# EAGLE board V2b_pcb (EAGLE 6.5.0)
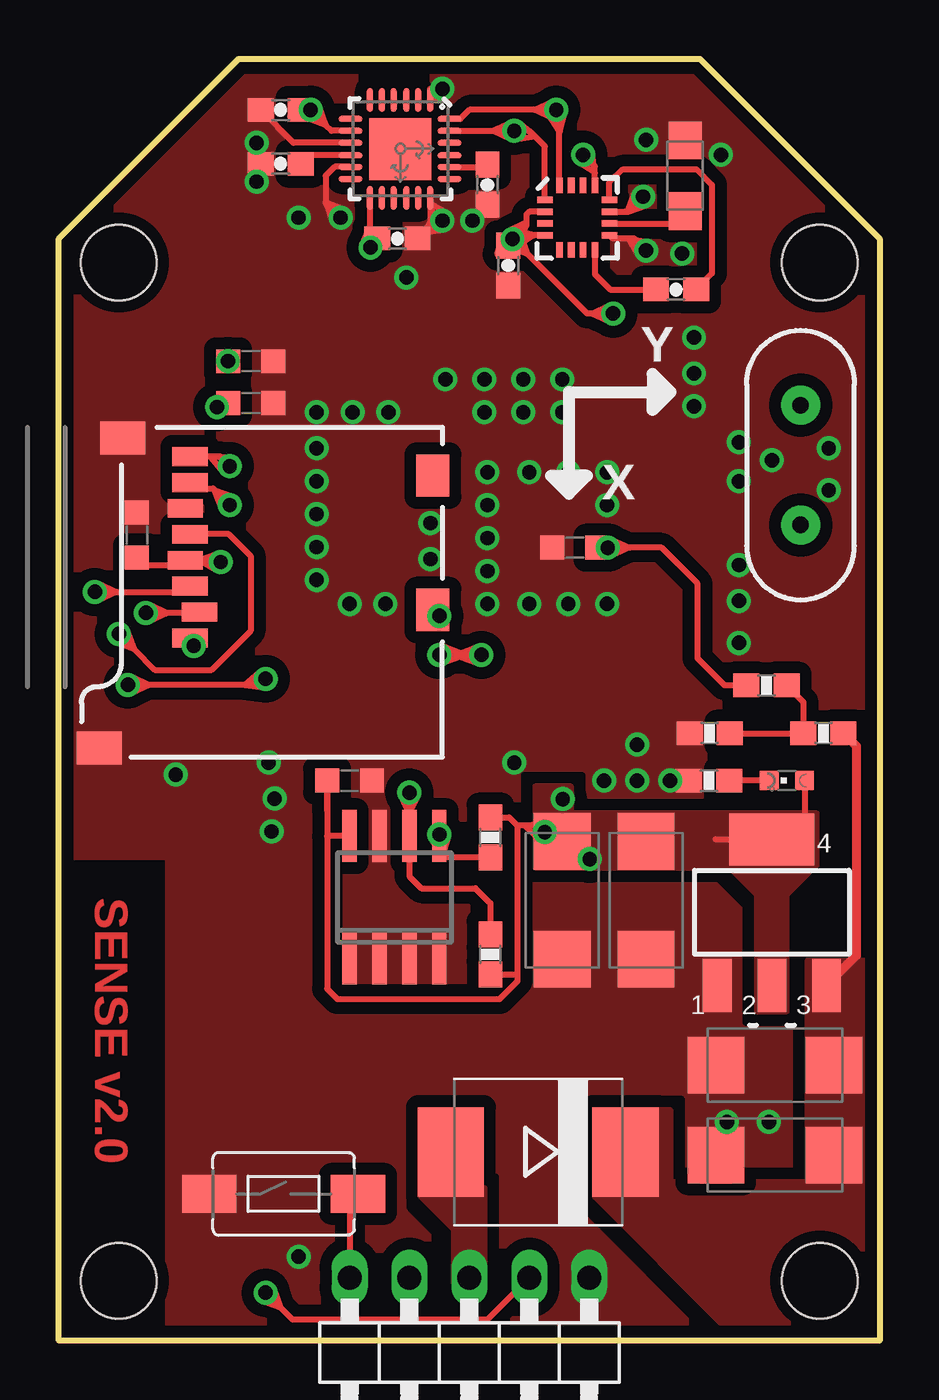
[diagram p0: board, top side]
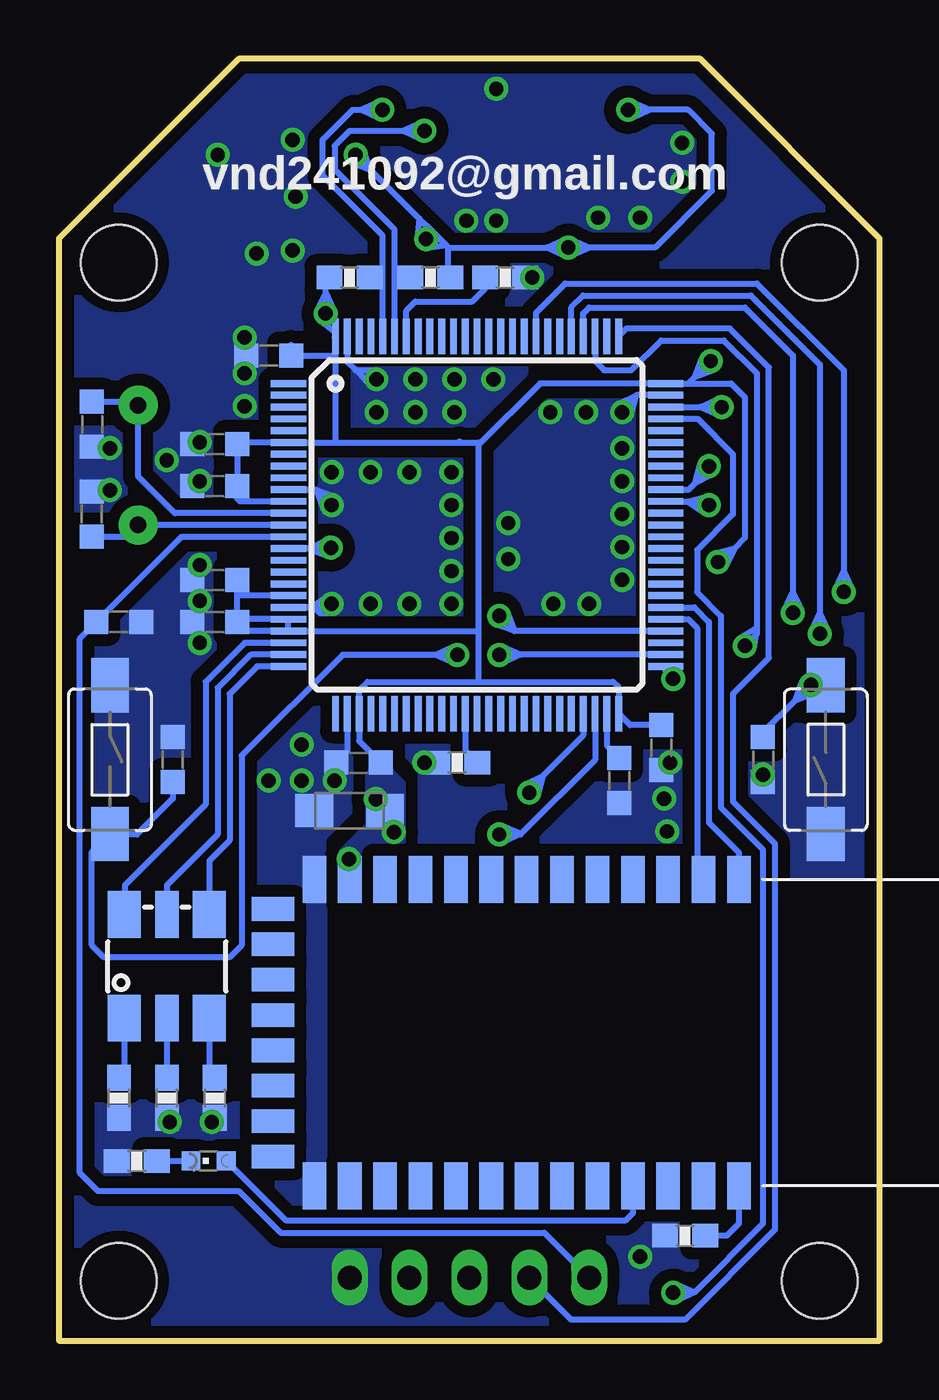
[diagram p1: board, bottom side, seen from below]

Size 34.8 x 54.36 mm. Coordinates in mm from the lower left corner, seen from the top.
Outline: 34.8,0 0,0 0,46.74 7.62,54.36 27.18,54.36 34.8,46.74 34.8,0
Copper layers (1*16): Top 0.035mm / dielectric 1.5mm / Bottom 0.035mm
Design rules "default *": minimum track width 10mil, minimum drill 24mil, track to track 8mil, track to pad 8mil, pad to pad 8mil, via to via 10mil, smd to smd 8mil, copper to edge 20mil, drill to drill 10mil, minimum pad ring 10mil, minimum via ring 8mil, stop-mask expansion 0mil, vias tented up to drill 100mil, thermal gap 10mil
Net classes: 1 power: width 0.15 mm, drill 0.2 mm, clearance 0.152 mm
Holes 3.2 mm at 2.54,2.54 2.54,45.72 32.26,45.72 32.26,2.54

## Footprints (pad centres in the part's own frame; a part is rotated, then mirrored left to right if it is on the bottom)
C-0603 = smd 1.016 x 1.016: 1 -0.953,0; 2 0.953,0
SMC_C = smd 2.4 x 2.4: + -2.5,0; - 2.5,0
SMC_A = smd 1.6 x 1.4: + -1.5,0; - 1.5,0
SPARKFUN_0603-CAP = smd 1.1 x 1: 1 -0.85,0; 2 0.85,0
SMC = smd 2.8 x 3.8: A 3.7,0; C -3.7,0
SO-08 = smd 0.6 x 2.2: 1 -1.905,-2.6; 2 -0.635,-2.6; 3 0.635,-2.6; 4 1.905,-2.6; 5 1.905,2.6; 6 0.635,2.6; 7 -0.635,2.6; 8 -1.905,2.6
LINEAR_SOT223 = smd 1.219 x 2.235: 1 -2.311,-3.099; 2 0,-3.099; 3 2.311,-3.099 | smd 3.6 x 2.2: 4 0,3.099
TESTING_QFN-24-4MM2 = smd 1.016 x 0.254: 1 -2.066,1.257; 2 -2.066,0.75; 3 -2.066,0.247; 4 -2.066,-0.287; 5 -2.066,-0.792; 6 -2.066,-1.297; 13 2.086,-1.297; 14 2.086,-0.792; 15 2.086,-0.287; 16 2.086,0.247; 17 2.086,0.75; 18 2.086,1.257 | smd 0.254 x 1.016: 7 -1.267,-2.122; 8 -0.762,-2.122; 9 -0.258,-2.122; 10 0.278,-2.122; 11 0.78,-2.122; 12 1.287,-2.122; 19 1.287,2.082; 20 0.78,2.082; 21 0.278,2.082; 22 -0.258,2.082; 23 -0.762,2.082; 24 -1.267,2.082 | smd 2.616 x 2.616: P$1 0.02,-0.01
SPARKFUN_16LPCC = smd 0.65 x 0.28: 1 -1.37,0.75; 2 -1.37,0.25; 3 -1.37,-0.25; 4 -1.37,-0.75; 9 1.37,-0.75; 10 1.37,-0.25; 11 1.37,0.25; 12 1.37,0.75 | smd 0.28 x 0.65: 5 -0.75,-1.37; 6 -0.25,-1.37; 7 0.25,-1.37; 8 0.75,-1.37; 13 0.75,1.37; 14 0.25,1.37; 15 -0.25,1.37; 16 -0.75,1.37
1X05/90 = drill 1.016 long: 1 -5.08,-3.81; 2 -2.54,-3.81; 3 0,-3.81; 4 2.54,-3.81; 5 5.08,-3.81
CHIPLED_0603 = smd 0.8 x 0.8: A 0,-0.75; C 0,0.75
SPARKFUN_0603-RES = smd 1.1 x 1: 1 -0.85,0; 2 0.85,0
TACTILE-SWITCH-1101NE = smd 2.3 x 1.6: P$1 -3.15,0; P$2 3.15,0
MICRO-SD-SOCKET-PP = smd 0.8 x 1.5: 1 -8.94,10.7; 2 -7.84,10.3; 3 -6.74,10.7; 4 -5.64,10.9; 5 -4.54,10.7; 6 -3.44,10.9; 7 -2.34,10.7; 8 -1.24,10.7 | smd 1.8 x 1.4: CD1 -2.05,0.4; CD2 -7.75,0.4 | smd 1.4 x 1.9: GND1 -13.6,14.55; GND3 -0.45,13.55
TQFP100 = smd 1.5 x 0.29: 1 -8,6; 2 -8,5.5; 3 -8,5; 4 -8,4.5; 5 -8,4; 6 -8,3.5; 7 -8,3; 8 -8,2.5; 9 -8,2; 10 -8,1.5; 11 -8,1; 12 -8,0.5; 13 -8,0; 14 -8,-0.5; 15 -8,-1; 16 -8,-1.5; 17 -8,-2; 18 -8,-2.5; 19 -8,-3; 20 -8,-3.5; 21 -8,-4; 22 -8,-4.5; 23 -8,-5; 24 -8,-5.5; 25 -8,-6; 51 8,-6; 52 8,-5.5; 53 8,-5; 54 8,-4.5; 55 8,-4; 56 8,-3.5; 57 8,-3; 58 8,-2.5; 59 8,-2; 60 8,-1.5; 61 8,-1; 62 8,-0.5; 63 8,0; 64 8,0.5; 65 8,1; 66 8,1.5; 67 8,2; 68 8,2.5; 69 8,3; 70 8,3.5; 71 8,4; 72 8,4.5; 73 8,5; 74 8,5.5; 75 8,6 | smd 0.29 x 1.5: 26 -6,-8; 27 -5.5,-8; 28 -5,-8; 29 -4.5,-8; 30 -4,-8; 31 -3.5,-8; 32 -3,-8; 33 -2.5,-8; 34 -2,-8; 35 -1.5,-8; 36 -1,-8; 37 -0.5,-8; 38 0,-8; 39 0.5,-8; 40 1,-8; 41 1.5,-8; 42 2,-8; 43 2.5,-8; 44 3,-8; 45 3.5,-8; 46 4,-8; 47 4.5,-8; 48 5,-8; 49 5.5,-8; 50 6,-8; 76 6,8; 77 5.5,8; 78 5,8; 79 4.5,8; 80 4,8; 81 3.5,8; 82 3,8; 83 2.5,8; 84 2,8; 85 1.5,8; 86 1,8; 87 0.5,8; 88 0,8; 89 -0.5,8; 90 -1,8; 91 -1.5,8; 92 -2,8; 93 -2.5,8; 94 -3,8; 95 -3.5,8; 96 -4,8; 97 -4.5,8; 98 -5,8; 99 -5.5,8; 100 -6,8
BLUETOOTH_SMD = smd 2 x 1: 1 0,0; 2 0,-1.5; 3 0,-3; 4 0,-4.5; 5 0,-6; 6 0,-7.5; 7 0,-9; 8 0,-10.5; 9 0,-12; 10 0,-13.5; 11 0,-15; 12 0,-16.5; 13 0,-18; 22 13,-18; 23 13,-16.5; 24 13,-15; 25 13,-13.5; 26 13,-12; 27 13,-10.5; 28 13,-9; 29 13,-7.5; 30 13,-6; 31 13,-4.5; 32 13,-3; 33 13,-1.5; 34 13,0 | smd 1 x 1.8: 14 1.25,-19.75; 15 2.75,-19.75; 16 4.25,-19.75; 17 5.75,-19.75; 18 7.25,-19.75; 19 8.75,-19.75; 20 10.25,-19.75; 21 11.75,-19.75
SMD = smd 1.99 x 1.4: B+ -2.2,-1.8; B- 2.2,-1.8; R+ -2.2,1.8; R- 2.2,1.8 | smd 1.99 x 1: G+ -2.2,0; G- 2.2,0
HC49US = drill 0.7 pad 1.651: 1 -2.54,0; 2 2.54,0

## Placement (x,y rotation side)
C1  [C-0603]  33.4,38.86 270 bottom
C2  [C-0603]  3.3,34.16 270 top
C3  6v 10u  [SMC_C]  24.89,18.67 270 top
C4  6v 10u  [SMC_A]  22.48,22.48 180 bottom
C5  16v47u  [SMC_C]  30.35,11.68 180 top
C6  [C-0603]  28.19,30.48 180 bottom
C7  [C-0603]  4.95,24.64 270 bottom
C8  [C-0603]  28.19,32.26 180 bottom
C9  [C-0603]  28.19,36.25 180 bottom
C10  [C-0603]  28.19,38.02 180 bottom
C11  [C-0603]  12.32,23.75 180 top
C12  [C-0603]  25.91,41.78 180 bottom
C13  [C-0603]  32.26,30.48 0 bottom
C14  [C-0603]  22.1,24.51 180 bottom
C15  [C-0603]  11.05,23.75 270 bottom
C16  16v47u  [SMC_C]  30.35,7.87 180 top
C17  [C-0603]  8.13,39.75 0 top
C18  [C-0603]  9.27,25.15 270 bottom
C19  [C-0603]  8.13,41.53 0 top
C20  [C-0603]  33.4,35.05 90 bottom
C21  [C-0603]  21.87,33.63 0 top
C23  6v 10u  [SMC_C]  21.34,18.67 270 top
C25  [C-0603]  29.97,24.64 90 bottom
C26  100n  [SPARKFUN_0603-CAP]  9.4,49.91 180 top
C27  100n  [SPARKFUN_0603-CAP]  26.16,44.58 0 top
C28  4.7u  [SMC_A]  26.54,49.4 90 top
C29  100n  [SPARKFUN_0603-CAP]  19.05,45.59 270 top
C36  2.2n  [SPARKFUN_0603-CAP]  18.16,49.02 270 top
C38  100n  [SPARKFUN_0603-CAP]  14.35,46.74 0 top
C39  100n  [SPARKFUN_0603-CAP]  9.4,52.2 180 top
D1  MBRS330T3  [SMC]  20.32,8 180 top
IC2  24LC256SN  [SO-08]  14.22,18.8 0 top
IC3  LINEAR_MC33269ST-3.3T3  [LINEAR_SOT223]  30.23,18.16 0 top
IC4  MPU-6050  [TESTING_QFN-24-4MM2]  14.48,50.55 270 top
IC5  HMC5883L  [SPARKFUN_16LPCC]  21.97,47.62 0 top
JP4  [1X05/90]  17.4,-1.14 180 top
LD1  [CHIPLED_0603]  28.45,7.62 90 bottom
LD2  [CHIPLED_0603]  30.86,23.75 90 top
R1  10K  [SPARKFUN_0603-RES]  27.56,23.75 180 top
R2  10K  [SPARKFUN_0603-RES]  28.19,10.29 270 bottom
R3  10K  [SPARKFUN_0603-RES]  30.23,10.29 270 bottom
R5  10K  [SPARKFUN_0603-RES]  8.26,4.44 180 bottom
R6  10K  [SPARKFUN_0603-RES]  32.26,10.29 270 bottom
R7  10k  [SPARKFUN_0603-RES]  15.88,45.09 180 bottom
R8  0.5k  [SPARKFUN_0603-RES]  17.91,24.51 0 bottom
R9  10K  [SPARKFUN_0603-RES]  31.5,7.62 180 bottom
R10  [SPARKFUN_0603-RES]  19.05,45.09 0 bottom
R11  [SPARKFUN_0603-RES]  22.48,45.09 180 bottom
R15  4K7  [SPARKFUN_0603-RES]  18.29,16.38 90 top
R16  4K7  [SPARKFUN_0603-RES]  18.29,21.34 90 top
R23  10K  [SPARKFUN_0603-RES]  30,27.79 180 top
R24  10K  [SPARKFUN_0603-RES]  32.41,25.76 0 top
R25  10K  [SPARKFUN_0603-RES]  27.58,25.76 0 top
S1  RESET  [TACTILE-SWITCH-1101NE]  9.53,6.22 0 top
S2  RESET  [TACTILE-SWITCH-1101NE]  32.64,24.64 270 bottom
S4  RESET  [TACTILE-SWITCH-1101NE]  2.29,24.64 90 bottom
SDCARD2  microSD Socket  [MICRO-SD-SOCKET-PP]  16.26,38.73 90 top
STM  STM32F4X7VX  [TQFP100]  17.07,34.59 0 bottom
U1  HC_05  [BLUETOOTH_SMD]  5.97,19.56 270 bottom
U$12  RGB_LED  [SMD]  30.23,15.88 90 bottom
Y1  [HC49US]  31.44,37.13 90 top

## Library data of the parts
C1 C2 C6-C15 C17-C21 C25 = cap-pan40
C3-C5 C16 C23 C28 = rcl
C26 C27 C29 C36 C38 C39 R10 R11 = Helios_RLC
D1 = Robotech Diode of Chung
IC2 = microchip; DIGIKEY: 24LC256-E/SN-ND; MF: MICROCHIP; MPN: 24LC256-I/SN; OC_FARNELL: 9757996; OC_NEWARK: 27C9144
IC3 = Robotech_Other
IC4 IC5 = Helios_IMU
JP4 = pinhead-1
LD1 LD2 = led
R1-R3 R5-R9 R15 R16 R23-R25 = Robotech_RCL
S1 S2 S4 = pixhawk2; PARTNO: EVQ-P7J01P
SDCARD2 = SparkFun
STM = pixhawk2; PARTNO: STM32F427VI
U1 = SerialPortBluetooth
U$12 = RGB_LED
Y1 = SparkFun-FreqCtrl

## Nets
3.3V: C2.2 C3.+ C4.+ C6.1 C8.1 C9.1 C10.1 C11.2 C12.1 C14.1 C18.1 C19.1 C23.+ C29.1 C38.1 C39.1 IC2.8 IC3.2 IC3.4 IC4.8 IC4.13 IC5.2 IC5.4 IC5.13 LD2.A R10.2 R11.2 R15.1 R16.2 SDCARD2.4 STM.6 STM.11 STM.19 STM.21 STM.22 STM.28 STM.50 STM.75 STM.100 U1.12
+5V: C5.+ C16.+ D1.C IC3.3 R24.2
ADC12_IN1: C21.2 R23.2 STM.15
ADC12_IN8: STM.35
BOOT0: R7.2 STM.94
BOOT1: R8.2 STM.37
BT_KEY: R5.1 U1.34
BUTTONA: C7.1 S4.P$2 STM.51
BUTTONB: C25.1 S2.P$2 STM.52
GND: C1.2 C2.1 C3.- C4.- C5.- C6.2 C7.2 C8.2 C9.2 C10.2 C11.1 C12.2 C13.2 C14.2 C15.2 C16.- C17.2 C18.2 C19.2 C20.2 C21.1 C23.- C25.2 C26.2 C28.- C29.2 C36.2 C38.2 C39.2 IC2.1 IC2.2 IC2.3 IC2.4 IC2.7 IC3.1 IC4.1 IC4.9 IC4.11 IC4.18 IC5.9 IC5.11 JP4.1 R1.2 R2.2 R3.2 R5.2 R6.2 R7.1 R8.1 R9.2 R25.1 S1.P$1 S2.P$1 S4.P$1 SDCARD2.6 SDCARD2.GND1 SDCARD2.GND3 STM.10 STM.20 STM.27 STM.74 STM.99 U1.13 U1.22
I2C1_SCL: IC4.23 IC5.1 R10.1 STM.95
I2C1_SDA: IC4.24 IC5.16 R11.1 STM.96
I2C2_SCL: IC2.6 R15.2 STM.47
I2C2_SDA: IC2.5 R16.1 STM.48
JTDI: STM.77
N$1: C1.1 STM.12 Y1.2
N$2: R2.1 U$12.B+
N$3: C26.1 IC4.10
N$4: LD1.A U1.31
N$5: LD1.C R9.1
N$6: R6.1 U$12.R+
N$7: R3.1 U$12.G+
N$8: C36.1 IC4.20
N$10: C27.1 IC5.8
N$11: LD2.C R1.1
N$12: C28.+ IC5.10
N$13: C27.2 IC5.12
N$27: R23.1 R24.1 R25.2
N$29: C20.1 STM.13 Y1.1
N$31: C17.1 STM.73
N$32: C15.1 STM.49
PWM_8: STM.63
PWM_9: STM.5
PWM_10: STM.64
PWM_11: STM.4
RGB_CH1: STM.23 U$12.R-
RGB_CH2: STM.24 U$12.G-
RGB_CH3: STM.25 U$12.B-
SDIO_CLK: SDCARD2.5 STM.80
SDIO_CMD: SDCARD2.3 STM.83
SDIO_D0: SDCARD2.7 STM.65
SDIO_D1: SDCARD2.8 STM.66
SDIO_D2: SDCARD2.1 STM.78
SDIO_D3: SDCARD2.2 STM.79
SDIO_DETECT: SDCARD2.CD2 STM.54
SW-!RESET: C13.1 JP4.5 S1.P$2 STM.14
SW_CLK: JP4.4 STM.76
SW_DIO: JP4.2 STM.72
USART1_RX: STM.93
USART1_TX: STM.92
USART3_RX: STM.56 U1.1
USART3_TX: STM.55 U1.2
VDD: D1.A JP4.3

## Tracks (layer width: path | path; a pad name or v marks a point on that pad's centre or on a via)
3.3V  (via drill 0.61)
  Top 0.254: R16.2 19.09,22.19 19.43,21.84 | 19.43,21.84 19.43,15.53 | 19.43,15.53 19.43,15.24 18.67,14.48 11.81,14.48 11.37,14.92 11.37,21.4 | IC5.13 22.72,49.52 | 22.72,49.52 22.72,49.8 v22.23,50.29 | 20.88,21.84 19.73,21.84 | 19.73,21.84 19.43,21.84 | v10.67,52.2 C39.1 | IC4.8 11.56,51.31 11.31,51.55 | 11.31,51.55 | 11.31,51.55 v10.67,52.2 | v19.23,46.72 19.38,46.87 19.43,46.87 | v7.17,41.54 C19.1 | 5.28,32.89 5.33,32.89 | 3.67,32.84 C2.2 3.3,32.86 5.33,32.86 5.33,32.89 | v23.5,43.56 22.58,43.56 | 22.58,43.56 22.39,43.56 19.88,46.07 | 19.88,46.07 | 19.88,46.07 v19.23,46.72 | IC5.4 20.13,46.87 | 20.13,46.87 19.43,46.87 | 27.83,21.26 IC3.4 31.61,21.26 LD2.A | IC5.2 19.94,47.87 19.81,47.75 19.81,47.42 | 19.81,47.42 19.81,47.3 v19.23,46.72 | IC4.13 13.18,47.27 | 13.18,47.27 13.18,47.06 C38.1 13.72,46.95 13.72,46.99 13.21,46.48 v13.21,46.35 | C29.1 19.43,46.82 19.43,46.87 | 11.37,21.4 C11.2 11.37,22.48 | SDCARD2.4 5.95,33.09 | 5.95,33.09 6.78,33.09 v6.86,33.02 | R15.1 19.43,15.53 | IC2.8 11.37,21.4 | 5.33,32.89 5.36,32.89 SDCARD2.4 | SDCARD2.4 5.23,33.09 5.23,32.99 | 19.88,46.07 19.59,46.85 | 19.59,46.85 | 19.88,46.07 | 19.88,46.07 19.1,46.36 | v19.23,46.72 19.1,46.36 | 11.31,51.55 11.03,52.33 | 11.03,52.33 | 11.31,51.55 | 11.31,51.55 10.54,51.84 | v10.67,52.2 10.54,51.84 | 22.58,43.56 23.34,43.21 | 19.88,46.07 | 11.31,51.55 | 22.72,49.52 22.6,50.35 v22.23,50.29 | 22.72,49.52 22.02,49.97 v22.23,50.29 | 19.88,46.07 19.59,46.85 | 19.59,46.85 | v19.23,46.72 19.59,46.85 | 19.88,46.07 19.1,46.36 | v19.23,46.72 19.36,46.36 18.58,46.07 18.87,46.85 v19.23,46.72 | 19.88,46.07 19.59,46.85 | v19.23,46.72 19.59,46.85 | 19.88,46.07 19.1,46.36 | v19.23,46.72 19.1,46.36 | 20.13,46.87 19.33,47.09 v19.23,46.72
  Top 0.254: 20.13,46.87 19.44,46.41 v19.23,46.72 | 19.81,47.42 19.06,47.06 v19.23,46.72 | 19.81,47.42 19.6,46.62 v19.23,46.72 | 11.31,51.55 11.03,52.33 | 11.03,52.33 | v10.67,52.2 11.03,52.33 | 11.31,51.55 10.54,51.84 | v10.67,52.2 10.63,51.82 9.8,51.91 10.41,52.47 v10.67,52.2 | 11.31,51.55 11.03,52.33 | v10.67,52.2 11.03,52.33 | 11.31,51.55 10.54,51.84 | v10.67,52.2 10.54,51.84 | 19.73,21.84 20.34,21.28 v20.6,21.57 20.55,21.94 19.73,21.84 | 5.95,33.09 6.67,32.69 v6.86,33.02 | 5.95,33.09 6.73,33.38 v6.86,33.02 | 23.34,43.21 | 22.58,43.56 | 22.58,43.56 23.34,43.21 | v23.5,43.56 23.34,43.21 | 22.58,43.56 | 22.58,43.56 23.34,43.91 | 23.34,43.91 | 22.58,43.56 | 22.58,43.56 23.34,43.91 | v23.5,43.56 23.34,43.91 | 22.58,43.56 23.34,43.21 | 23.34,43.21 | 22.58,43.56 23.34,43.21 | v23.5,43.56 23.34,43.21 | 22.58,43.56 23.34,43.91 | 23.34,43.91 | v23.5,43.56 23.34,43.91 | 22.58,43.56 23.34,43.21 | 22.58,43.56 23.34,43.91 | 22.58,43.56 23.34,43.21 | v23.5,43.56 23.34,43.21 | 22.58,43.56 23.34,43.91 | v23.5,43.56 23.34,43.91 | 13.18,47.27 12.86,46.5 v13.21,46.35 | 13.18,47.27 13.55,46.52 v13.21,46.35
  Bottom 0.254: C10.1 27.24,37.96 | 27.24,37.96 C9.1 27.24,35.72 27.11,35.59 STM.11 | STM.100 23.12,42.54 | 27.24,37.96 27.11,38.09 STM.6 23.07,38.09 | 23.07,38.09 23.07,41.91 | 23.07,41.91 STM.100 | STM.22 17.02,30.09 | STM.22 STM.21 25.09,30.61 27.24,30.61 | 17.02,37.97 17.02,38.09 17.78,38.09 | 17.02,37.97 17.02,30.09 | 23.07,38.09 17.78,38.09 | 17.02,37.97 14.4,40.59 STM.75 8.11,40.59 | 23.07,41.91 23.2,41.78 C12.1 24.96,42.23 | 17.82,38.13 17.78,38.09 | C18.1 10.58,26.1 STM.50 11.07,27.71 11.3,27.94 17.02,27.94 | STM.22 27.31,30.09 | STM.19 27.24,31.59 C8.1 27.24,30.61 | C6.1 27.24,30.61 | C4.+ 21.15,22.65 | 9.14,26.23 C18.1 | C14.1 22.07,25.44 STM.28 22.07,27.59 21.72,27.94 17.02,27.94 | 9.08,26.1 C18.1 | 9.75,52.2 8.13,52.2 7.11,51.18 7.11,48.77 9.53,46.35 12.29,46.35 | 9.75,52.2 v10.67,52.2 | 23.2,44.95 23.62,44.95 23.5,44.83 23.5,44.48 | 18.29,46.35 18.29,45.17 R10.2 18.16,45.12 | 8.11,40.59 7.81,40.89 | 7.81,40.89 | 7.81,40.89 v7.17,41.54 | 8.11,40.59 6.3,40.59 5.72,40 5.72,34.04 6.15,33.6 | 17.02,30.09 17.02,27.94 | STM.100 23.07,42.75 | 23.07,42.75 23.07,43.14 v23.5,43.56 | v23.5,43.56 23.5,44.48 | R11.2 23.2,44.95 | 23.2,44.95 23.07,44.95 | v19.23,46.72 19.23,47.3 | 19.23,47.3 19.52,47.59 | 19.52,47.59 21.58,49.65 | 21.58,49.65 v22.23,50.29 | 18.29,46.35 18.36,46.43 | 18.36,46.43 19.23,47.3 | 12.29,46.35 v13.21,46.35 | 18.29,46.35 14.12,46.35 | 14.12,46.35 v13.21,46.35 | U1.12 22.47,20.39 v22.5,20.42 | 6.15,33.6 6.73,33.02 v6.86,33.02 | 9.75,52.2 10.51,51.85 | 7.81,40.89 7.52,41.67 | 7.52,41.67 | 7.81,40.89 | 7.81,40.89 7.03,41.18 | v7.17,41.54 7.03,41.18 | 23.5,44.48 23.15,43.72 | 12.29,46.35 13.05,46.01 | 7.81,40.89 | 23.15,43.72 | 14.12,46.35 | 14.12,46.35 13.37,46.7
  Bottom 0.254: 13.37,46.7 | 21.58,49.65 | 21.58,49.65 22.36,49.93 | 22.36,49.93 | 21.58,49.65 | 21.58,49.65 21.87,50.42 | 21.87,50.42 | 21.58,49.65 21.87,50.42 | 21.87,50.42 | 21.58,49.65 22.36,49.93 | 22.36,49.93 | v22.23,50.29 22.36,49.93 | 21.58,49.65 21.87,50.42 | v22.23,50.29 21.87,50.42 | 21.58,49.65 22.36,49.93 | v22.23,50.29 22.36,49.93 | 21.58,49.65 21.87,50.42 | v22.23,50.29 21.87,50.42 | 19.52,47.59 18.95,46.98 v19.23,46.72 | 19.52,47.59 19.61,46.76 v19.23,46.72 | 18.36,46.43 19.19,46.34 v19.23,46.72 | 18.36,46.43 18.97,47 v19.23,46.72 | 10.51,51.85 | 9.75,52.2 | 9.75,52.2 10.51,51.85 | v10.67,52.2 10.51,51.85 | 9.75,52.2 | 9.75,52.2 10.51,52.54 | 10.51,52.54 | 9.75,52.2 | 9.75,52.2 10.51,52.54 | v10.67,52.2 10.51,52.54 | 9.75,52.2 10.51,51.85 | 10.51,51.85 | 9.75,52.2 10.51,51.85 | v10.67,52.2 10.51,51.85 | 9.75,52.2 10.51,52.54 | 10.51,52.54 | v10.67,52.2 10.51,52.54 | 9.75,52.2 10.51,51.85 | 9.75,52.2 10.51,52.54 | 9.75,52.2 10.51,51.85 | v10.67,52.2 10.51,51.85 | 9.75,52.2 10.51,52.54 | v10.67,52.2 10.51,52.54 | v7.17,41.54 6.91,41.26 | 7.81,40.89 7.52,41.67 | 7.52,41.67 | v7.17,41.54 7.52,41.67 | 7.81,40.89 7.03,41.18 | 7.81,40.89 7.52,41.67 | v7.17,41.54 7.52,41.67 | 7.81,40.89 7.03,41.18 | v7.17,41.54 7.03,41.18 | 6.15,33.6 6.52,32.85 v6.86,33.02 | 6.15,33.6 6.96,33.39 v6.86,33.02 | 23.5,44.48 | 23.5,44.48 23.15,43.72 | v23.5,43.56 23.15,43.72 | 23.5,44.48 | 23.5,44.48 23.84,43.72 | 23.84,43.72 | 23.5,44.48 | 23.5,44.48 23.84,43.72 | v23.5,43.56 23.84,43.72 | 23.07,42.75 23.73,43.26 v23.5,43.56 | 23.07,42.75 23.11,43.58 v23.5,43.56 | 23.5,44.48 23.15,43.72 | 23.15,43.72 | 23.5,44.48 23.15,43.72 | v23.5,43.56 23.15,43.72 | 23.5,44.48 23.84,43.72 | 23.84,43.72 | v23.5,43.56 23.84,43.72 | 23.5,44.48 23.15,43.72
  Bottom 0.254: 23.5,44.48 23.84,43.72 | 23.5,44.48 23.15,43.72 | v23.5,43.56 23.15,43.72 | 23.5,44.48 23.84,43.72 | v23.5,43.56 23.84,43.72 | 13.05,46.01 | 12.29,46.35 | 12.29,46.35 13.05,46.01 | v13.21,46.35 13.05,46.01 | 12.29,46.35 | 12.29,46.35 13.05,46.7 | 13.05,46.7 | 12.29,46.35 | 12.29,46.35 13.05,46.7 | v13.21,46.35 13.05,46.7 | 14.12,46.35 | 14.12,46.35 13.37,46.7 | v13.21,46.35 13.37,46.7 | 14.12,46.35 | 14.12,46.35 13.37,46.01 | 13.37,46.01 | 14.12,46.35 | 14.12,46.35 13.37,46.01 | v13.21,46.35 13.37,46.01 | 12.29,46.35 13.05,46.01 | 13.05,46.01 | 12.29,46.35 13.05,46.01 | v13.21,46.35 13.05,46.01 | 12.29,46.35 13.05,46.7 | 13.05,46.7 | v13.21,46.35 13.05,46.7 | 12.29,46.35 13.05,46.01 | 12.29,46.35 13.05,46.7 | 12.29,46.35 13.05,46.01 | v13.21,46.35 13.05,46.01 | 12.29,46.35 13.05,46.7 | v13.21,46.35 13.05,46.7 | 14.12,46.35 13.37,46.01 | 13.37,46.01 | 14.12,46.35 13.37,46.7 | 13.37,46.7 | v13.21,46.35 13.37,46.7 | 14.12,46.35 13.37,46.01 | v13.21,46.35 13.37,46.01 | 14.12,46.35 13.37,46.7 | v13.21,46.35 13.37,46.7 | 14.12,46.35 13.37,46.01 | v13.21,46.35 13.37,46.01
  other vias: 21.36,22.96
  pour Top (isolate 0.508, no thermals): 20.19,20.07 28.45,20.07 29.59,18.92 29.59,13.97 30.86,13.97 30.86,18.92 32.13,20.19 32.13,22.35 21.72,22.35 21.72,23.49 20.19,23.49
  pour Bottom (isolate 0.508, no thermals): 21.59,24.13 21.72,24 21.72,21.84 22.86,20.7 22.86,20.57 22.1,20.57 21.46,21.21 20.19,21.21 20.19,23.62 20.7,24.13
+5V
  Top 0.381: 33.26,15.79 IC3.3 33.81,16.33 33.81,25.21 R24.2
  pour Top (isolate 0.508, no thermals): 31.75,16.13 34.16,16.13 34.16,6.73 34.04,6.73 34.04,0.64 28.19,0.64 22.73,6.1 22.73,9.78 23.11,6.1 23.11,9.78 25.91,9.78 25.91,6.73 31.75,6.73
ADC12_IN1  (via drill 0.61 pad 0.25)
  Top 0.254: R23.2 28.22,27.79 27.08,28.93 27.08,32.11 25.55,33.63 24.18,33.63 | 24.18,33.63 v23.27,33.63 | C21.2 v23.27,33.63 | 24.18,33.63 23.43,33.98 v23.27,33.63 | 24.18,33.63 23.43,33.28 v23.27,33.63
  Bottom 0.254: v23.27,33.63 23.3,33.59 24.18,33.59 | 24.18,33.59 STM.15 | 24.18,33.59 23.44,33.97 v23.27,33.63 | 24.18,33.59 23.41,33.28 v23.27,33.63
BOOT0
  Bottom 0.254: STM.94 20.07,43.68 19.69,44.07 17.27,44.07 16.73,44.62 R7.2
BOOT1
  Bottom 0.254: STM.37 17.57,25.03 R8.2
BT_KEY
  Bottom 0.254: U1.34 5.97,4.95 6.48,4.44 R5.1
BUTTONA  (via drill 0.61)
  Top 0.254: v8.76,28.07 8.51,27.81 7.88,27.81 | 7.88,27.81 3.84,27.81 | 3.84,27.81 v2.92,27.81 | 3.84,27.81 | 3.84,27.81 3.08,28.16 | 3.08,28.16 | 7.88,27.81 8.71,27.69 v8.76,28.07 | 7.88,27.81 8.51,28.36 v8.76,28.07 | 3.84,27.81 | 3.84,27.81 3.08,28.16 | v2.92,27.81 3.08,28.16 | 3.84,27.81 | 3.84,27.81 3.08,27.47 | 3.08,27.47 | 3.84,27.81 | 3.84,27.81 3.08,27.47 | v2.92,27.81 3.08,27.47 | 3.84,27.81 3.08,27.47 | 3.08,27.47 | 3.84,27.81 3.08,28.16 | 3.08,28.16 | v2.92,27.81 3.08,28.16 | 3.84,27.81 3.08,27.47 | v2.92,27.81 3.08,27.47 | 3.84,27.81 3.08,28.16 | v2.92,27.81 3.08,28.16 | 3.84,27.81 3.08,27.47 | v2.92,27.81 3.08,27.47
  Bottom 0.254: 9.03,28.59 STM.51 9.07,28.38 v8.76,28.07 | C7.1 4.95,25.78 3.57,27.17 | 3.57,27.17 | 3.57,27.17 v2.92,27.81 | v2.92,27.81 2.31,27.81 S4.P$2 | 3.57,27.17 3.28,27.95 | 3.28,27.95 | 3.57,27.17 | 3.57,27.17 2.79,27.46 | v2.92,27.81 2.79,27.46 | 3.57,27.17 | 3.57,27.17 3.28,27.95 | 3.28,27.95 | v2.92,27.81 3.28,27.95 | 3.57,27.17 2.79,27.46 | v2.92,27.81 2.86,27.44 2.04,27.56 2.67,28.1 v2.92,27.81 | 3.57,27.17 3.28,27.95 | v2.92,27.81 3.28,27.95 | 3.57,27.17 2.79,27.46 | v2.92,27.81 2.79,27.46
BUTTONB  (via drill 0.61)
  Top 0.254: v16.13,29.08 16.99,29.08 | 16.99,29.08 17.04,29.08 | 17.04,29.08 v17.91,29.08 | 16.99,29.08 17.04,29.11 | 17.04,29.08 | 16.29,28.74 | 17.04,29.08 16.29,28.74 | 16.27,29.44 | 16.99,29.11 16.29,29.43 | 16.29,29.43 | 16.29,29.43 | 17.04,29.06 17.75,28.74 | 17.75,28.74 | 16.99,29.11 17.04,29.08 | 16.99,29.11 17.04,29.13 | 17.04,29.13 17.76,29.43 | 16.99,29.08 17.04,29.06 | 17.04,29.06 17.75,28.74 | 16.99,29.08 17.04,29.11 | 17.04,29.11 17.75,29.43 | 16.99,29.04 17.04,29.02 | 17.04,29.02 17.77,28.73 | 16.99,29.04 17.04,29.06 | 17.04,29.06 17.73,29.42 | 16.99,29.13 17.04,29.15 | 17.04,29.15 17.77,29.44 | 16.99,29.08 17.75,28.74 | 16.99,29.11 17.04,29.08 | 17.04,29.08 17.74,28.74 | 16.99,29.06 17.04,29.04 | 17.04,29.04 17.76,28.73 | 16.99,29.06 17.04,29.08 | 17.04,29.08 17.74,29.42 | 16.99,29.08 17.04,29.11 | 17.04,29.11 17.75,29.43 | 16.99,29.08 17.04,29.06 | 17.04,29.06 17.75,28.74 | 16.99,29.08 17.04,29.06 | 17.04,29.06 17.75,28.74 | 16.99,29.08 17.04,29.11 | 17.04,29.11 17.75,29.43 | 17.04,29.08 | 16.29,29.43 | v16.13,29.08 16.29,29.43 | 17.04,29.08 | 16.99,29.06 16.29,28.74 | 16.29,28.74 | 17.04,29.08 | 17.04,29.08 16.29,28.74 | v16.13,29.08 16.29,28.74 | 17.04,29.08 16.29,28.74 | 16.29,28.74 | 16.29,28.74 | 16.99,29.11 16.29,29.43 | 16.29,29.43 | 16.28,29.43 | 17.04,29.08 16.99,29.11 | 16.99,29.11 16.29,29.43 | 16.29,29.43 | v16.13,29.08 16.29,29.43 | 17.04,29.08 16.29,28.74 | 16.29,28.74 | v16.13,29.08 16.29,28.74 | 17.04,29.08 16.99,29.11 | 16.99,29.11 16.29,29.43 | 16.29,29.43 | v16.13,29.08 16.29,29.43 | 17.04,29.08 16.99,29.06 | 16.99,29.06 16.29,28.74 | 16.29,28.74 | v16.13,29.08 16.29,28.74 | 17.04,29.13 16.27,29.44 | 16.99,29.13 16.28,29.43 | v16.13,29.08 16.28,29.43 | 16.99,29.08 16.3,28.74
  Top 0.254: 16.3,28.74 | 16.3,28.74 | 17.04,29.11 16.28,29.43 | 16.99,29.08 16.3,29.42 | 16.3,29.42 16.3,29.43 | 16.99,29.13 16.28,29.43 | 17.04,29.08 16.99,29.1 | 16.99,29.1 16.29,29.43 | 17.04,29.08 16.99,29.06 | 16.99,29.06 16.29,28.74 | 17.04,29.13 16.99,29.15 | 16.99,29.15 16.27,29.44 | v16.13,29.08 16.27,29.44 | 17.04,29.13 16.99,29.1 | 16.99,29.1 16.3,28.74 | 16.3,28.74 | v16.13,29.08 16.3,28.74 | 17.04,29.06 16.3,29.43 | 16.3,29.43 | v16.13,29.08 16.3,29.43 | 17.04,29.06 16.28,28.73 | v16.13,29.08 16.28,28.73 | 17.04,29.11 16.28,29.43 | 16.28,29.43 | 16.28,29.43 v16.13,29.08 | 17.04,29.11 16.3,28.74 | v16.13,29.08 16.3,28.74 | 17.04,29.02 16.31,29.42 v16.13,29.08 | 17.04,29.02 16.26,28.73 v16.13,29.08 | 17.04,29.06 16.29,29.43 v16.13,29.08 | 17.04,29.06 16.28,28.73 v16.13,29.08 | v16.13,29.08 16.28,29.43 17.04,29.1 16.29,28.74 v16.13,29.08 | 17.04,29.15 16.26,29.44 v16.13,29.08 | 17.04,29.15 16.31,28.75 v16.13,29.08 | 16.3,29.42 17.04,29.06 16.28,28.73 | v16.13,29.08 16.3,29.42 | 16.28,28.73 | 16.28,28.73 v16.13,29.08 | 16.28,29.43 17.04,29.1 16.3,28.74 | v16.13,29.08 16.28,29.43 | 16.3,28.74 | v16.13,29.08 16.3,28.74 | 17.04,29.08 16.29,29.43 | v16.13,29.08 16.29,29.43 | 17.04,29.08 16.29,28.74 | v16.13,29.08 16.29,28.74 | 17.04,29.13 16.27,29.44 | v16.13,29.08 16.27,29.44 | 17.04,29.13 16.3,28.74 | v16.13,29.08 16.3,28.74 | 17.04,29.04 16.99,29.06 | 16.99,29.06 16.3,29.42 v16.13,29.08 | 17.04,29.04 16.99,29.02 | 16.99,29.02 16.27,28.73 v16.13,29.08 | 17.04,29.08 16.99,29.11 | 16.99,29.11 16.29,29.43 | v16.13,29.08 16.29,29.43 | 17.04,29.08 16.99,29.06 | 16.99,29.06 16.29,28.74 | v16.13,29.08 16.29,28.74 | 16.99,29.04 16.28,28.73 | 17.04,29.06 16.99,29.08 | 16.3,29.43
  Top 0.254: v16.13,29.08 16.3,29.43 | 17.04,29.06 16.99,29.04 | 16.99,29.04 16.28,28.73 | v16.13,29.08 16.28,28.73 | 17.04,29.11 16.28,29.43 | 17.04,29.11 16.3,28.74 | 17.04,29.06 16.99,29.08 | 16.99,29.08 16.3,29.43 | v16.13,29.08 16.3,29.43 | 17.04,29.06 16.99,29.04 | 16.99,29.04 16.28,28.73 | v16.13,29.08 16.28,28.73 | 17.04,29.11 16.99,29.13 | 16.99,29.13 16.28,29.43 | v16.13,29.08 16.28,29.43 | 17.04,29.11 16.99,29.08 | 16.99,29.08 16.3,28.74 | v16.13,29.08 16.3,28.74 | 16.99,29.08 | 16.99,29.08 17.75,28.74 | 17.75,28.74 | 16.99,29.08 17.75,28.74 | v17.91,29.08 17.75,28.74 | 16.99,29.08 | 17.75,29.43 | 16.99,29.08 | 16.99,29.08 | 17.75,29.43 | v17.91,29.08 17.75,29.43 | 16.99,29.11 17.76,29.43 | 17.76,29.43 | 17.76,29.43 | 16.99,29.11 17.74,28.74 | 17.74,28.74 | 16.99,29.06 17.74,29.42 | 17.74,29.42 17.74,29.43 | 16.99,29.1 17.74,28.74 | 17.74,28.74 | 17.74,28.74 v17.91,29.08 | 16.99,29.1 17.76,29.43 | v17.91,29.08 17.76,29.43 | 16.99,29.06 17.76,28.73 | 17.76,28.73 | v17.91,29.08 17.76,28.73 | 16.99,29.06 17.74,29.42 | v17.91,29.08 17.74,29.42 | 16.99,29.15 17.72,28.75 v17.91,29.08 | 16.99,29.15 17.77,29.44 v17.91,29.08 | 16.99,29.1 17.74,28.74 v17.91,29.08 | 16.99,29.1 17.76,29.43 v17.91,29.08 | 16.99,29.06 17.76,28.73 v17.91,29.08 | 16.99,29.06 17.74,29.43 v17.91,29.08 | 16.99,29.02 17.77,28.73 v17.91,29.08 | 16.99,29.02 17.72,29.42 v17.91,29.08 | 16.99,29.11 17.74,28.74 | v17.91,29.08 17.74,28.74 | 16.99,29.11 17.76,29.43 | 17.76,29.43 | v17.91,29.08 17.76,29.43 | 16.99,29.06 17.76,28.73 v17.91,29.08 | 16.99,29.06 17.74,29.43 v17.91,29.08 | 16.99,29.04 17.77,28.73 | 16.99,29.04 17.73,29.42 | 17.73,28.74 | 16.99,29.08 17.75,29.43 | 16.99,29.13 17.73,28.74 | v17.91,29.08 17.73,28.74
  Top 0.254: 16.99,29.13 17.77,29.44 | 17.77,29.44 | 16.99,29.08 17.75,28.74 | 16.99,29.08 17.75,29.43 | 16.99,29.08 17.75,28.74 | 17.75,28.74 | 16.99,29.08 17.75,29.43 | 17.75,29.43 | 16.99,29.11 17.74,28.74 | 17.74,28.74 | 16.99,29.11 17.76,29.43 | v17.91,29.08 17.76,29.43 | 16.99,29.08 17.75,28.74 | v17.91,29.08 17.75,28.74 | 16.99,29.08 17.75,29.43 | 17.75,29.43 | v17.91,29.08 17.75,29.43 | 16.99,29.04 17.77,28.73 | v17.91,29.08 17.77,28.73 | 16.99,29.04 17.73,29.42 | v17.91,29.08 17.73,29.42 | 16.99,29.13 17.73,28.74 | v17.91,29.08 17.73,28.74 | 16.99,29.13 17.77,29.44 | v17.91,29.08 17.77,29.44 | 16.99,29.08 17.75,28.74 | 17.75,28.74 | v17.91,29.08 17.75,28.74 | 16.99,29.08 17.75,29.43 | v17.91,29.08 17.75,29.43 | 16.99,29.11 17.74,28.74 | v17.91,29.08 17.74,28.74 | 16.99,29.11 17.76,29.43 | v17.91,29.08 17.76,29.43 | 16.99,29.06 17.76,28.73 | v17.91,29.08 17.76,28.73 | 16.99,29.06 17.74,29.43 | v17.91,29.08 17.74,29.43 | 16.99,29.08 17.75,28.74 | 17.75,28.74 | 16.99,29.08 17.75,28.74 | v17.91,29.08 17.75,28.74 | 16.99,29.08 17.75,29.43 | 17.75,29.43 | v17.91,29.08 17.75,29.43 | 16.99,29.08 17.75,28.74 | 16.99,29.08 17.75,29.43 | 16.99,29.08 17.75,28.74 | v17.91,29.08 17.75,28.74 | 16.99,29.08 17.75,29.43 | v17.91,29.08 17.75,29.43
  Bottom 0.254: C25.1 29.97,22.99 31.5,21.46 32.61,21.46 S2.P$2 33.4,20.73 33.4,16.76 32.89,16.26 27.56,16.26 27.05,16.76 27.05,24.8 22.77,29.08 18.82,29.08 | STM.52 15.21,29.09 | 15.21,29.09 v16.13,29.09 v16.13,29.08 | v17.91,29.08 18.82,29.08 | 18.82,29.08 | 18.82,29.08 18.07,29.43 | 18.07,29.43 | 15.21,29.09 15.97,28.74 v16.13,29.08 | 15.21,29.09 15.97,29.43 v16.13,29.08 | 18.82,29.08 | 18.82,29.08 18.07,29.43 | v17.91,29.08 18.07,29.43 | 18.82,29.08 | 18.82,29.08 18.07,28.74 | 18.07,28.74 | 18.82,29.08 | 18.82,29.08 18.07,28.74 | v17.91,29.08 18.07,28.74 | 18.82,29.08 18.07,28.74 | 18.07,28.74 | 18.82,29.08 18.07,29.43 | 18.07,29.43 | v17.91,29.08 18.07,29.43 | 18.82,29.08 18.07,28.74 | v17.91,29.08 18.07,28.74 | 18.82,29.08 18.07,29.43 | v17.91,29.08 18.07,29.43 | 18.82,29.08 18.07,28.74 | v17.91,29.08 18.07,28.74
GND  (via drill 0.61)
  Top 0.254: 8.64,52.11 C39.2 9.94,50.8 IC4.9 | IC5.11 24,47.87 24,47.88 24.11,47.88 | 16.16,52.61 IC4.1 15.73,53.07 16.13,53.47 | v24.89,46.23 24.38,46.74 24.13,46.74 | 24.13,46.74 23.48,46.74 IC5.9 | 24.11,47.88 24.13,47.88 v24.77,48.51 | IC4.11 12.34,49.77 12.32,49.78 11.68,49.78 11.3,49.4 11.3,48.28 | IC4.18 15.73,48.25 | 15.73,48.25 15.73,47.27 15.48,47.01 | 15.48,47.01 C38.2 | 11.3,48.28 11.3,48.26 v11.94,47.62 | 15.48,47.01 15.94,47.71 | 15.94,47.71 | 24.13,46.74 24.57,46.03 v24.89,46.23 | 24.13,46.74 24.95,46.6 v24.89,46.23 | 24.11,47.88 24.89,48.15 v24.77,48.51 | 24.11,47.88 24.41,48.65 v24.77,48.51 | 15.48,47.01 | 15.48,47.01 15.94,47.71 | v16.26,47.5 15.94,47.71 | 15.73,48.25 15.88,47.43 v16.26,47.5 | 15.73,48.25 16.45,47.83 v16.26,47.5 | 15.48,47.01 16.3,47.12 | 16.3,47.12 | v16.26,47.5 16.3,47.12 | 15.48,47.01 15.94,47.71 | v16.26,47.5 15.94,47.71 | 15.48,47.01 16.3,47.12 | v16.26,47.5 16.3,47.12 | 15.48,47.01 15.94,47.71 | v16.26,47.5 15.94,47.71 | 11.3,48.28 11.58,47.5 v11.94,47.62 | 11.3,48.28 12.08,47.98 v11.94,47.62
  Bottom 0.254: 24.14,31.09 23.98,31.09 | 23.98,31.09 23.75,30.86 23.11,30.86 | 23.52,31.09 23.98,31.09 | 24.14,31.09 STM.20 | STM.74 10.33,40.09 10.34,40.08 | 10.34,40.08 10.92,39.5 | STM.99 22.57,41.49 22.23,41.15 22.17,41.15 | STM.10 23.9,36.09 23.89,36.08 | 23.89,36.08 | 23.89,36.08 v23.24,35.43 | STM.27 22.57,24.99 22.92,24.64 | 22.92,24.64 C14.2 | 21.72,41.15 v21.34,40.77 | 21.72,41.15 21.34,41.15 v21.34,40.77 | 23.89,36.08 23.11,35.79 | v23.24,35.43 23.11,35.79 | 23.89,36.08 23.6,35.3 | v23.24,35.43 23.6,35.3 | v23.24,35.43 23.4,35.78 | v23.24,35.43 23.4,35.09 | 23.89,36.08 23.11,35.79 | v23.24,35.43 23.11,35.79 | 23.89,36.08 23.6,35.3 | v23.24,35.43 23.6,35.3 | 24.14,31.09 23.45,31.56 v23.24,31.24 23.34,30.87 24.14,31.09 | 10.34,40.08 10.55,39.27 v10.92,39.37 11.09,39.71 10.34,40.08 | 22.17,41.15 21.72,41.15 | 22.17,41.15 21.62,40.52 v21.34,40.77 | 22.92,24.64 22.74,23.83 v23.11,23.75 23.42,23.98 22.92,24.64
  other vias: 23.24,36.83 18.03,39.37 21.34,39.37 19.68,39.37 18.03,40.77 19.68,40.77 26.92,42.55 28.83,31.37 28.83,32.89 28.83,36.45 28.83,38.1 24.89,50.93 8.38,50.8 19.3,24.51 32.64,36.07 32.64,37.85 12.45,39.37 13.97,39.37 28.07,50.29 16.26,53.09 8.89,24.51 28.83,29.59 8.38,49.15 14.73,45.09 30.1,9.27 28.32,9.27 4.95,24 24.51,25.27 25.91,23.75 24.51,23.75 18.16,36.83 18.16,32.64 18.16,34.04 18.16,35.43 18.16,31.24 19.94,31.24 21.59,31.24 19.94,36.83 21.59,36.83 30.23,37.34 16.38,40.77 10.92,37.85 10.92,33.66 10.92,35.05 10.92,36.45 10.92,32.26 12.32,31.24 13.84,31.24 15.75,33.15 15.75,34.67 26.92,39.62 26.92,41.02 10.16,47.62 10.16,3.56 26.42,46.1 17.53,47.5 9.14,22.99 9.02,21.59
  pour Bottom (isolate 0.508, rank 6, no thermals): 4.95,19.68 -8,19.68 -8,54.74 34.93,54.74 35.05,-0.25 5.08,-0.25 5.08,7.37 23.62,7.37 23.62,18.67 4.95,18.67
  pour Top (isolate 0.508, rank 6, no thermals): 4.7,-7.62 35.05,-7.62 35.05,54.48 -0.25,54.48 -0.25,20.57 4.7,20.57
I2C1_SCL  (via drill 0.61)
  Top 0.254: IC4.23 18.39,51.31 | v19.3,51.31 19.94,51.31 20.18,51.06 | IC5.1 20.6,50.65 20.18,51.06 | 18.39,51.31 v19.3,51.31 | 18.39,51.31 19.15,50.96 | 19.15,50.96 | 18.39,51.31 | 18.39,51.31 19.15,50.96 | v19.3,51.31 19.15,50.96 | 18.39,51.31 | 18.39,51.31 19.15,51.65 | 19.15,51.65 | 18.39,51.31 | 18.39,51.31 19.15,51.65 | v19.3,51.31 19.15,51.65 | 20.18,51.06 19.55,51.6 v19.3,51.31 | 20.18,51.06 19.36,50.93 v19.3,51.31 | 18.39,51.31 19.15,50.96 | 19.15,50.96 | 18.39,51.31 19.15,50.96 | v19.3,51.31 19.15,50.96 | 18.39,51.31 19.15,51.65 | 19.15,51.65 | v19.3,51.31 19.15,51.65 | 18.39,51.31 19.15,50.96 | 18.39,51.31 19.15,51.65 | 18.39,51.31 19.15,50.96 | v19.3,51.31 19.15,50.96 | 18.39,51.31 19.15,51.65 | v19.3,51.31 19.15,51.65
  Bottom 0.254: STM.95 20.57,45.08 | 20.57,45.08 20.57,47.11 23.11,49.66 23.11,50.67 22.48,51.31 20.22,51.31 | 20.22,51.31 v19.3,51.31 | R10.1 20.57,45.08 | 20.22,51.31 | 20.22,51.31 19.46,51.65 | 19.46,51.65 | 20.22,51.31 | 20.22,51.31 19.46,51.65 | v19.3,51.31 19.46,51.65 | 20.22,51.31 | 20.22,51.31 19.46,50.96 | 19.46,50.96 | 20.22,51.31 | 20.22,51.31 19.46,50.96 | v19.3,51.31 19.46,50.96 | 20.22,51.31 19.46,50.96 | 19.46,50.96 | 20.22,51.31 19.46,51.65 | 19.46,51.65 | v19.3,51.31 19.46,51.65 | 20.22,51.31 19.46,50.96 | v19.3,51.31 19.46,50.96 | 20.22,51.31 19.46,51.65 | v19.3,51.31 19.46,51.65 | 20.22,51.31 19.46,50.96 | v19.3,51.31 19.46,50.96
I2C1_SDA  (via drill 0.61)
  Top 0.254: v21.08,52.2 20.33,52.2 | IC4.24 17.02,51.82 17.4,52.2 20.17,52.2 | IC5.16 21.22,51.29 | 21.22,51.29 21.22,51.3 21.22,51.29 | v21.08,52.2 20.17,52.2 | 21.22,51.29 21.23,51.28 21.23,51.3 | 21.23,51.3 21.23,52.04 v21.08,52.2 | 20.17,52.2 | 20.17,52.2 20.92,51.85 | 20.17,52.2 20.92,52.54 | 20.92,52.54 | v21.08,52.2 20.92,52.54 | 20.17,52.2 | 20.17,52.2 20.92,51.85 | 20.92,51.85 | 20.17,52.2 | 21.22,51.29 21.45,52.09 v21.08,52.2 | 21.22,51.29 20.76,51.99 v21.08,52.2 | 20.17,52.2 20.92,51.85 | 20.92,51.85 | v21.08,52.2 20.92,51.85 | 20.17,52.2 20.92,52.54 | 20.17,52.2 20.92,51.85 | v21.08,52.2 20.92,51.85 | 20.17,52.2 20.92,52.54 | 20.92,52.54 | v21.08,52.2 20.92,52.54 | 20.17,52.2 20.92,51.85 | v21.08,52.2 20.92,51.85 | 20.17,52.2 20.92,52.54 | v21.08,52.2 20.92,52.54 | 21.22,51.29 21.45,52.09 v21.08,52.2 | 21.22,51.29 20.76,51.99 v21.08,52.2 | 21.23,51.3 21.45,52.1 v21.08,52.2 | 21.23,51.3 20.77,51.98 v21.08,52.2
  Bottom 0.254: STM.96 21.07,45.08 | 21.07,45.08 21.07,46.85 23.62,49.4 23.62,50.93 22.35,52.2 22,52.2 | 22,52.2 | 22,52.2 v21.08,52.2 | 21.23,52.2 v21.08,52.2 | R11.1 21.07,45.08 | 22,52.2 21.24,52.54 | 21.24,52.54 | v21.08,52.2 21.24,52.54 | 22,52.2 21.24,51.85 | 21.24,51.85 | 22,52.2 21.24,52.54 | 21.24,52.54 | 22,52.2 21.24,52.54 | v21.08,52.2 21.24,52.54 | 22,52.2 | 21.24,51.85 | v21.08,52.2 21.24,51.85 | 22,52.2 21.24,52.54 | 22,52.2 | 22,52.2 21.24,51.85 | v21.08,52.2 21.24,51.85 | 22,52.2 21.24,52.54 | v21.08,52.2 21.24,52.54 | 22,52.2 21.24,51.85 | v21.08,52.2 21.24,51.85
I2C2_SCL  (via drill 0.61)
  Top 0.254: R15.2 18.29,18.54 17.65,19.18 15.37,19.18 14.86,19.68 IC2.6 14.86,22.33 | 14.86,22.33 v14.86,23.24 | 14.86,22.33 | 14.86,22.33 15.21,23.08 | 15.21,23.08 | 14.86,22.33 | 14.86,22.33 15.21,23.08 | v14.86,23.24 15.21,23.08 | 14.86,22.33 | 14.86,22.33 14.51,23.08 | 14.51,23.08 | 14.86,22.33 | 14.86,22.33 14.51,23.08 | v14.86,23.24 14.51,23.08 | 14.86,22.33 14.51,23.08 | 14.51,23.08 | 14.86,22.33 15.21,23.08 | 15.21,23.08 | v14.86,23.24 15.21,23.08 | 14.86,22.33 14.51,23.08 | v14.86,23.24 14.51,23.08 | 14.86,22.33 15.21,23.08 | v14.86,23.24 15.21,23.08 | 14.86,22.33 14.51,23.08 | v14.86,23.24 14.51,23.08
  Bottom 0.254: STM.47 12.57,25.66 14.28,23.95 | 14.28,23.95 14.86,23.37 v14.86,23.24 | 14.28,23.95 14.49,23.14 v14.86,23.24 | 14.28,23.95 15.03,23.58 v14.86,23.24
I2C2_SDA  (via drill 0.61)
  Top 0.254: R16.1 16.34,20.49 16.27,20.56 | 16.27,20.56 16.13,20.7 IC2.5 v16.13,21.46 | 16.27,20.56 16.5,21.36 v16.13,21.46 | 16.27,20.56 15.81,21.25 v16.13,21.46
  Bottom 0.254: STM.48 12.07,24.63 15.22,21.49 | 15.22,21.49 15.24,21.46 v16.13,21.46 | 15.22,21.49 15.96,21.12 v16.13,21.46 | 15.22,21.49 15.98,21.81 v16.13,21.46
N$1
  Bottom 0.254: STM.12 29.88,35.09 31.44,36.65 Y1.2 31.59,39.81 C1.1
N$2
  Bottom 0.254: U$12.B+ 28.43,11.37 R2.1
N$3
  Top 0.254: IC4.10 10.61,50.27 C26.1
N$4
  Bottom 0.254: LD1.A 25.16,5.08 10.8,5.08 10.47,5.41 U1.31
N$5
  Bottom 0.254: R9.1 LD1.C
N$6
  Bottom 0.254: U$12.R+ 32.03,11.37 R6.1
N$7
  Bottom 0.254: U$12.G+ R3.1
N$8
  Top 0.254: IC4.20 18.06,49.77 C36.1
N$10
  Top 0.254: IC5.8 22.72,45.22 23.37,44.58 C27.1
N$11
  Top 0.254: LD2.C R1.1
N$12
  Top 0.254: IC5.10 26.02,47.37 C28.+
N$13
  Top 0.254: IC5.12 23.34,49.12 23.88,49.66 27.05,49.66 27.69,49.02 27.69,45.25 C27.2
N$27
  Top 0.254: R25.2 R24.1 31.56,27.07 R23.1
N$29
  Bottom 0.254: STM.13 Y1.1 | Y1.1 | C20.1 31.93,34.1 Y1.1
N$31  (via drill 0.61)
  Top 0.254: v6.7,39.59 6.86,39.75 C17.1
  Bottom 0.254: STM.73 7.61,39.59 | 7.61,39.59 v6.7,39.59 | 7.61,39.59 | 7.61,39.59 6.86,39.94 | 6.86,39.94 | 7.61,39.59 | 7.61,39.59 6.86,39.94 | v6.7,39.59 6.86,39.94 | 7.61,39.59 | 7.61,39.59 6.86,39.25 | 6.86,39.25 | 7.61,39.59 | 7.61,39.59 6.86,39.25 | v6.7,39.59 6.86,39.25 | 7.61,39.59 6.86,39.25 | 6.86,39.25 | 7.61,39.59 6.86,39.94 | 6.86,39.94 | v6.7,39.59 6.86,39.94 | 7.61,39.59 6.86,39.25 | v6.7,39.59 6.86,39.25 | 7.61,39.59 6.86,39.94 | v6.7,39.59 6.86,39.94 | 7.61,39.59 6.86,39.25 | v6.7,39.59 6.86,39.25
N$32
  Bottom 0.254: STM.49 11.57,25.22 C15.1
RGB_CH1
  Bottom 0.254: STM.23 26.92,29.59 28.58,27.94 28.58,22.73 32,19.3 32,18.1 U$12.R-
RGB_CH2
  Bottom 0.254: STM.24 26.66,29.09 28.07,27.69 28.07,21.46 30.23,19.3 U$12.G- | U$12.G- 30.23,17.65 30.1,17.78 30.1,17.95 U$12.G-
RGB_CH3
  Bottom 0.254: STM.25 26.4,28.59 27.56,27.43 27.56,21.21 28.43,20.34 U$12.B-
SDIO_CLK  (via drill 0.61)
  Top 0.254: v2.54,29.97 3.19,29.33 | 3.19,29.33 | 3.19,29.33 4.06,28.45 6.48,28.45 8.13,30.1 8.13,33.27 7.21,34.19 SDCARD2.5 | 3.19,29.33 2.9,30.1 | 2.9,30.1 | 3.19,29.33 | 3.19,29.33 2.41,29.61 | v2.54,29.97 2.41,29.61 | 3.19,29.33 | 3.19,29.33 2.9,30.1 | 2.9,30.1 | v2.54,29.97 2.9,30.1 | 3.19,29.33 2.41,29.61 | v2.54,29.97 2.89,30.13 | v2.54,29.97 2.89,30.13 | v2.54,29.97 2.89,30.13 | 3.19,29.33 2.9,30.1 | v2.54,29.97 2.9,30.1 | 3.19,29.33 2.41,29.61 | v2.54,29.97 2.41,29.61
  Bottom 0.254: STM.80 13.07,43.82 12.57,44.32 5.46,44.32 2.54,41.4 2.54,30.89 | 2.54,30.89 v2.54,29.97 | 2.54,30.89 2.19,30.13 | 2.19,30.13 | 2.54,30.89 | 2.54,30.89 2.19,30.13 | v2.54,29.97 2.19,30.13 | 2.54,30.89 | 2.54,30.89 2.89,30.13 | 2.89,30.13 | 2.54,30.89 | 2.54,30.89 2.89,30.13 | v2.54,29.97 2.89,30.13 | 2.54,30.89 2.19,30.13 | 2.19,30.13 | 2.54,30.89 2.19,30.13 | v2.54,29.97 2.19,30.13 | 2.54,30.89 2.89,30.13 | 2.89,30.13 | v2.54,29.97 2.89,30.13 | 2.54,30.89 2.19,30.13 | 2.54,30.89 2.89,30.13 | 2.54,30.89 2.19,30.13 | v2.54,29.97 2.19,30.13 | 2.54,30.89 2.89,30.13 | v2.54,29.97 2.89,30.13
SDIO_CMD  (via drill 0.61)
  Top 0.254: 5.42,31.75 5.43,31.74 5.43,31.99 SDCARD2.3 5.31,31.75 2.44,31.75 | v1.52,31.75 2.44,31.75 | 2.44,31.75 | 2.44,31.75 1.68,32.1 | 1.68,32.1 | 2.44,31.75 | 2.44,31.75 1.68,32.1 | v1.52,31.75 1.68,32.1 | 2.44,31.75 | 2.44,31.75 1.68,31.4 | 1.68,31.4 | 2.44,31.75 | 2.44,31.75 1.68,31.4 | v1.52,31.75 1.68,31.4 | 2.44,31.75 1.68,31.4 | 1.68,31.4 | 2.44,31.75 1.68,32.1 | 1.68,32.1 | v1.52,31.75 1.68,32.1 | 2.44,31.75 1.68,31.4 | v1.52,31.75 1.68,31.4 | 2.44,31.75 1.68,32.1 | v1.52,31.75 1.68,32.1 | 2.44,31.75 1.68,31.4 | v1.52,31.75 1.68,31.4
  Bottom 0.254: STM.83 14.57,43.59 13.34,44.83 5.21,44.83 1.52,41.15 1.52,32.66 | 1.52,32.66 v1.52,31.75 | 1.52,32.66 1.18,31.91 | 1.18,31.91 | 1.52,32.66 | 1.52,32.66 1.18,31.91 | v1.52,31.75 1.18,31.91 | 1.52,32.66 | 1.52,32.66 1.87,31.91 | 1.87,31.91 | 1.52,32.66 | 1.52,32.66 1.87,31.91 | v1.52,31.75 1.87,31.91 | 1.52,32.66 1.18,31.91 | 1.18,31.91 | 1.52,32.66 1.18,31.91 | v1.52,31.75 1.18,31.91 | 1.52,32.66 1.87,31.91 | 1.87,31.91 | v1.52,31.75 1.87,31.91 | 1.52,32.66 1.18,31.91 | 1.52,32.66 1.87,31.91 | 1.52,32.66 1.18,31.91 | v1.52,31.75 1.18,31.91 | 1.52,32.66 1.87,31.91 | v1.52,31.75 1.87,31.91
SDIO_D0  (via drill 0.61)
  Top 0.254: SDCARD2.7 5.81,36.14 6.53,36.14 6.59,36.08 | 6.59,36.08 | 6.59,36.08 v7.24,35.43 | 6.59,36.08 | 6.59,36.08 6.88,35.3 | v7.24,35.43 6.88,35.3 | 6.59,36.08 7.37,35.79 | v7.24,35.43 7.37,35.79 | 6.59,36.08 6.88,35.3 | 6.59,36.08 | 6.59,36.08 6.88,35.3 | v7.24,35.43 6.88,35.3 | 6.59,36.08 7.37,35.79 | v7.24,35.43 7.37,35.79
  Bottom 0.254: STM.65 8.14,35.59 | 8.14,35.59 7.4,35.59 v7.24,35.43 | 8.14,35.59 7.34,35.8 v7.24,35.43 | 8.14,35.59 7.46,35.12 v7.24,35.43
SDIO_D1  (via drill 0.61)
  Top 0.254: v7.24,37.08 6.83,37.49 6.42,37.49 | 6.42,37.49 SDCARD2.8 | 6.42,37.49 6.94,36.85 v7.24,37.08 | 6.42,37.49 7.25,37.46 v7.24,37.08
  Bottom 0.254: STM.66 8.1,36.09 7.82,36.38 | 7.82,36.38 7.24,36.96 v7.24,37.08 | 7.82,36.38 7.61,37.18 v7.24,37.08 | 7.82,36.38 7.07,36.74 v7.24,37.08
SDIO_D2  (via drill 0.61)
  Top 0.254: 5.65,29.85 5.72,29.78 v5.72,29.46 5.56,29.62 SDCARD2.1
  Bottom 0.254: STM.78 12.07,41.54 11.68,41.15 10.54,41.15 9.27,42.42 6.6,42.42 5.21,41.02 5.21,30.22 | 5.21,30.22 5.21,29.97 v5.72,29.46 | 5.21,30.22 5.34,29.4 v5.72,29.46 | 5.21,30.22 5.91,29.79 v5.72,29.46
SDIO_D3  (via drill 0.61)
  Top 0.254: SDCARD2.2 5.92,30.86 4.6,30.86 | 4.6,30.86 v3.68,30.86 | 4.6,30.86 | 4.6,30.86 3.84,31.21 | 3.84,31.21 | 4.6,30.86 | 4.6,30.86 3.84,31.21 | v3.68,30.86 3.84,31.21 | 4.6,30.86 | 4.6,30.86 3.84,30.51 | 3.84,30.51 | 4.6,30.86 | 4.6,30.86 3.84,30.51 | v3.68,30.86 3.84,30.51 | 4.6,30.86 3.84,30.51 | 3.84,30.51 | 4.6,30.86 3.84,31.21 | 3.84,31.21 | v3.68,30.86 3.84,31.21 | 4.6,30.86 3.84,30.51 | v3.68,30.86 3.84,30.51 | 4.6,30.86 3.84,31.21 | v3.68,30.86 3.84,31.21 | 4.6,30.86 3.84,30.51 | v3.68,30.86 3.84,30.51
  Bottom 0.254: STM.79 12.57,43.56 12.32,43.81 5.72,43.81 3.68,41.78 3.68,31.78 | 3.68,31.78 v3.68,30.86 | 3.68,31.78 3.34,31.02 | 3.34,31.02 | 3.68,31.78 | 3.68,31.78 3.34,31.02 | v3.68,30.86 3.34,31.02 | 3.68,31.78 | 3.68,31.78 4.03,31.02 | 4.03,31.02 | 3.68,31.78 | 3.68,31.78 4.03,31.02 | v3.68,30.86 4.03,31.02 | 3.68,31.78 3.34,31.02 | 3.34,31.02 | 3.68,31.78 3.34,31.02 | v3.68,30.86 3.34,31.02 | 3.68,31.78 4.03,31.02 | 4.03,31.02 | v3.68,30.86 4.03,31.02 | 3.68,31.78 3.34,31.02 | 3.68,31.78 4.03,31.02 | 3.68,31.78 3.34,31.02 | v3.68,30.86 3.34,31.02 | 3.68,31.78 4.03,31.02 | v3.68,30.86 4.03,31.02
SDIO_DETECT  (via drill 0.61)
  Top 0.254: v16.13,30.73 16.13,31 | v16.13,30.73 | SDCARD2.CD2 15.88,30.98 v16.13,30.73
  Bottom 0.254: STM.54 15.48,30.09 | 15.48,30.09 15.49,30.09 v16.13,30.73 | 15.48,30.09 16.26,30.38 v16.13,30.73 | 15.48,30.09 15.77,30.87 v16.13,30.73
SW-!RESET
  Top 0.254: S1.P$2 12.7,6.2 12.7,5.97 12.32,5.59 JP4.5
  Bottom 0.254: STM.14 29.6,34.09 C13.1 33.91,29.78 33.91,7.11 33.15,6.35 27.18,6.35 25.4,4.57 14.22,4.57 JP4.5
SW_CLK
  Bottom 0.254: JP4.4 13.08,0.89 8.26,0.89 4.45,4.7 4.45,21.08 6.22,22.86 6.22,27.43 4.7,28.96 4.7,41.27 6.35,42.93 10.74,42.93 STM.76
SW_DIO  (via drill 0.61)
  Top 0.254: JP4.2 18.16,0.89 9.91,0.89 9.41,1.39 | 9.41,1.39 | 9.41,1.39 v8.76,2.03 | 9.41,1.39 9.12,2.16 | 9.12,2.16 | 9.41,1.39 | 9.41,1.39 8.63,1.67 | v8.76,2.03 8.63,1.67 | 9.41,1.39 | 9.41,1.39 9.12,2.16 | 9.12,2.16 | v8.76,2.03 9.12,2.16 | 9.41,1.39 8.63,1.67 | v8.76,2.03 8.59,1.69 | 9.41,1.39 9.12,2.16 | v8.76,2.03 9.12,2.16 | 9.41,1.39 8.63,1.67 | v8.76,2.03 8.63,1.67
  Bottom 0.254: 7.85,2.06 4.95,4.95 4.95,20.83 6.73,22.61 6.73,30.73 7.75,31.75 7.75,33.53 6.22,35.05 6.22,37.59 7.72,39.09 STM.72 | 7.85,2.06 7.87,2.03 v8.76,2.03 | 7.85,2.06 8.59,1.69 v8.76,2.03 | 7.85,2.06 8.61,2.38 v8.76,2.03
USART3_RX
  Bottom 0.254: STM.56 7.85,31.09 7.24,30.48 7.24,21.97 5.97,20.7 U1.1
USART3_TX
  Bottom 0.254: STM.55 8.11,30.59 7.75,30.23 7.75,19.56 U1.2
VDD
  pour Top (isolate 0.762, no thermals): 18.03,6.48 18.03,2.41 16.76,2.41 16.76,4.7 15.37,6.1 15.37,6.48

## Text on the board
Top: SENSE v2.0
tNames: Y | X
bNames: vnd241092@gmail.com